# Altium PCB STM32F407VET6mini.PcbDoc
Units mil, origin at the board's own origin, x right, y up, seen from the top; angles counter-clockwise.
Board outline 1950 x 1551 mil, 2 copper layers (Top Layer, Bottom Layer); 5 components, 0 nets, 111 pads, 0 vias.
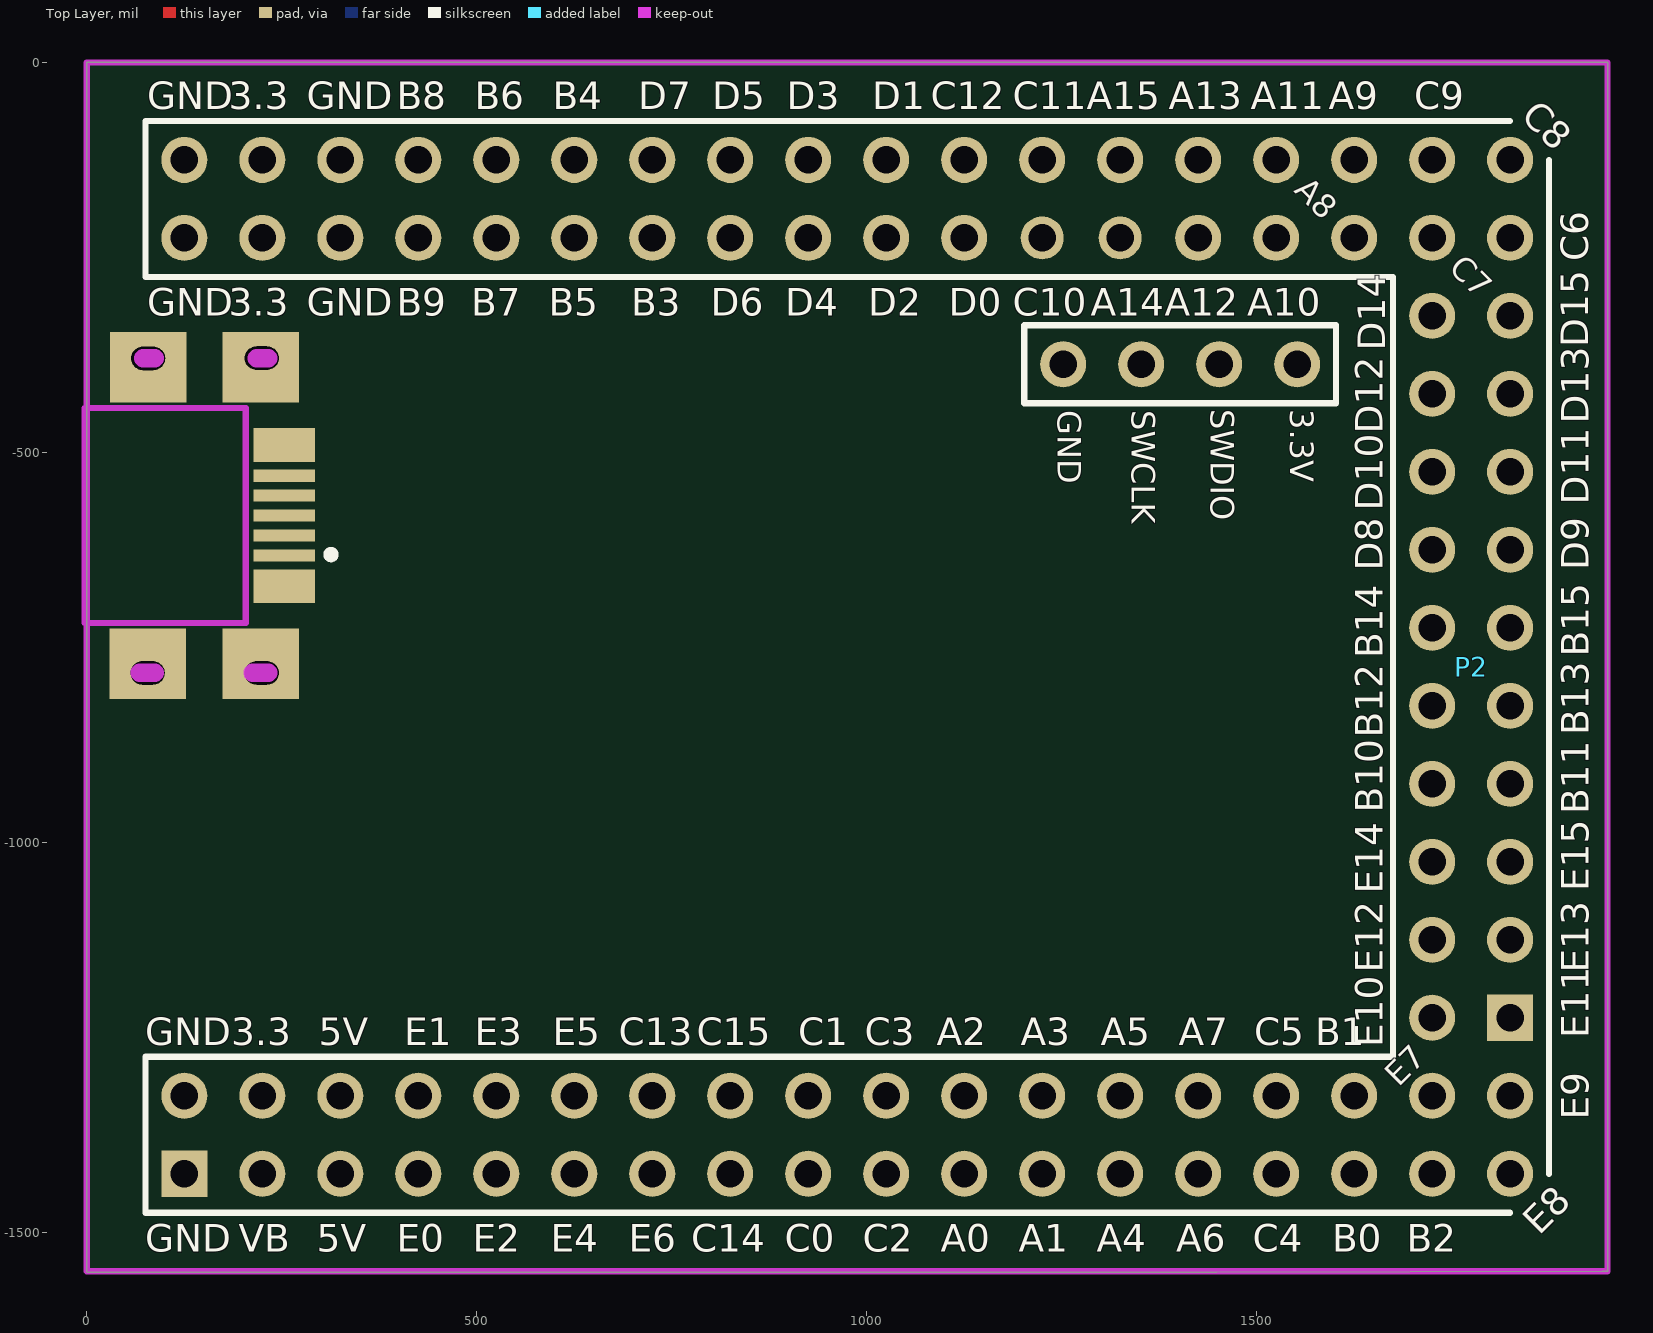
[diagram p0: Top Layer view]
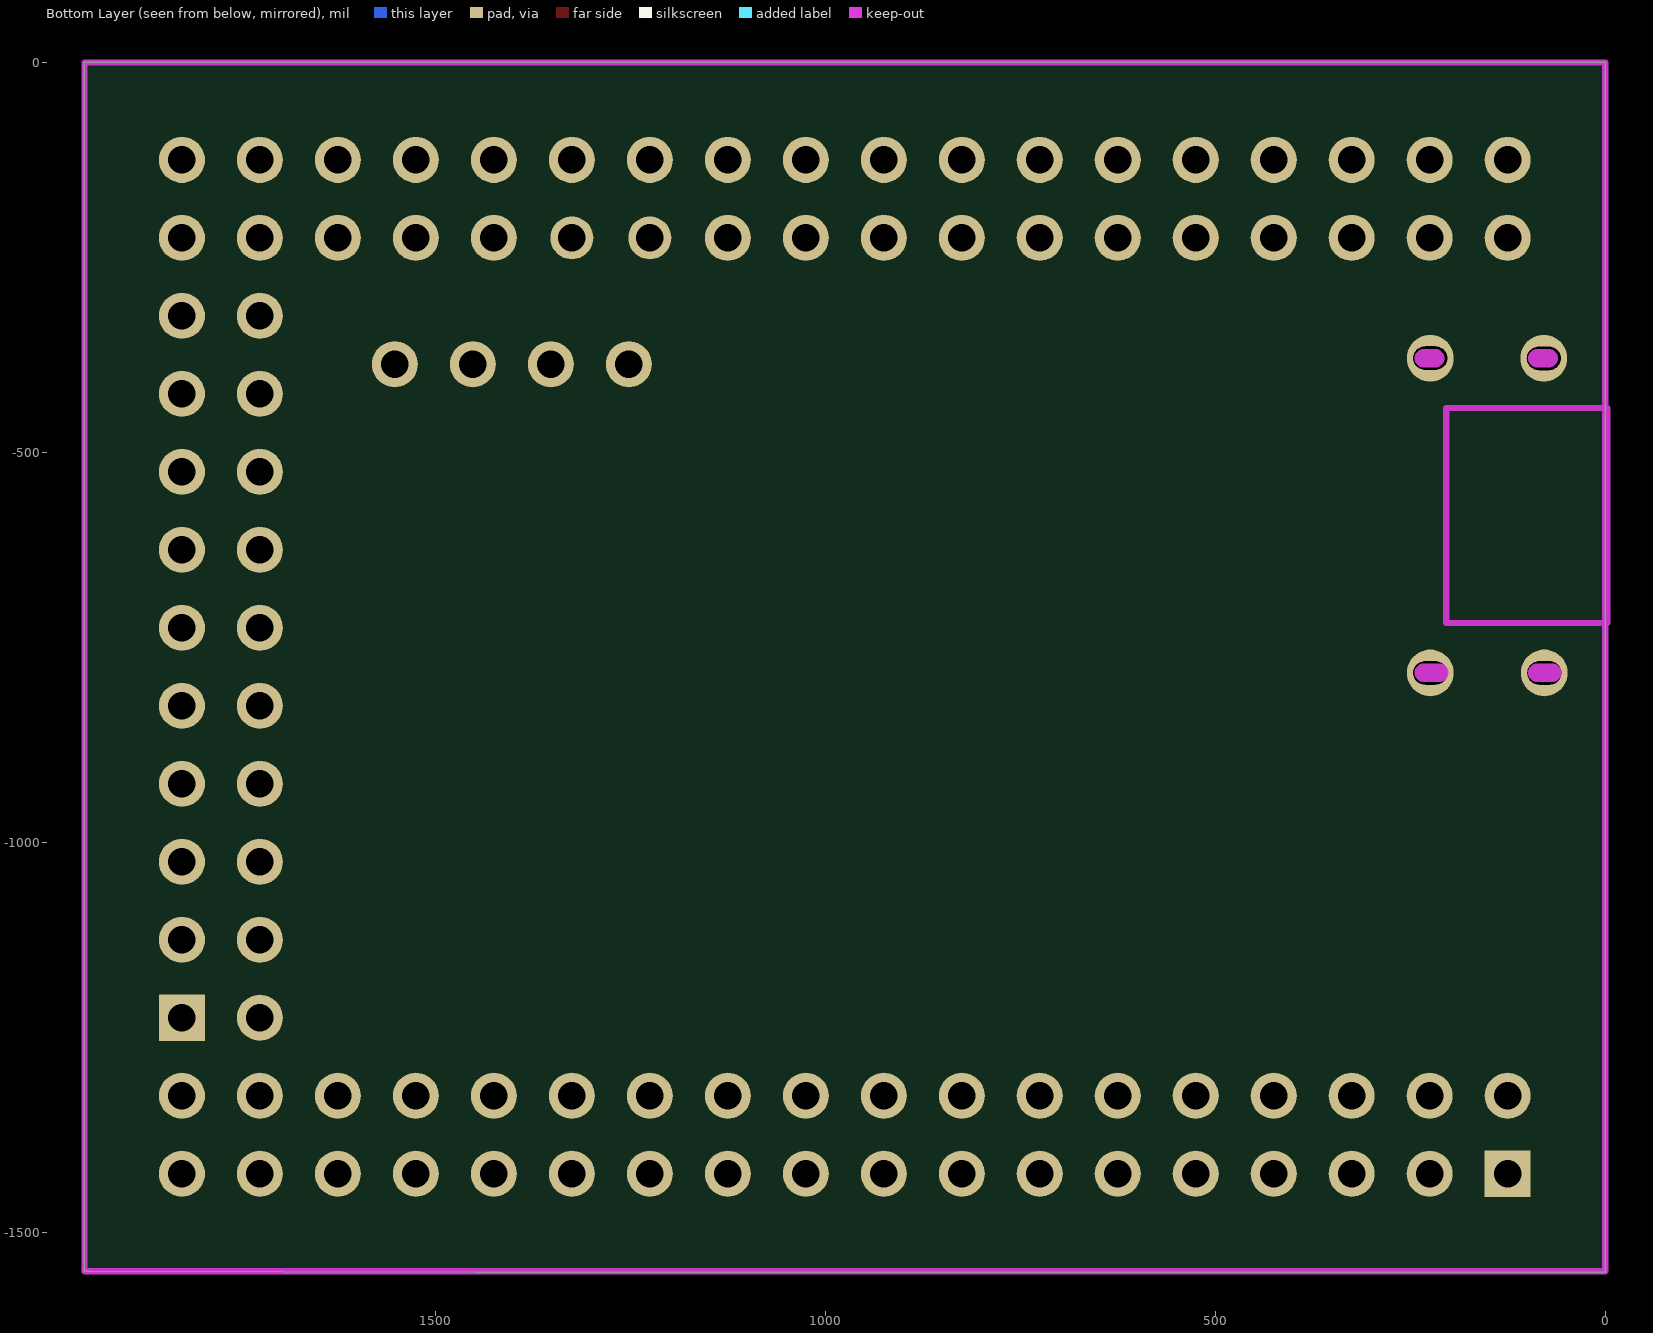
[diagram p1: Bottom Layer view, seen from below]

## Layer stack, top to bottom
Top Solder: solder mask 0.4, Solder Resist, Dk 3.5
Top Layer: signal copper 1.4
Dielectric1: dielectric 12.6, FR-4, Dk 4.8
Bottom Layer: signal copper 1.4
Bottom Solder: solder mask 0.4, Solder Resist, Dk 3.5

## Board outline
1449,-1551 0,-1551 0,-12 0,0 51,0 1950,0 1950,-713 1950,-1550 1943,-1550

## Design rules (kind name [scope] priority, off if disabled: settings)
Clearance [All] p1: gap=6
FabricationTestpoint [(IsPad And (OnTopLayer Or OnBottomLayer))] p1: side=3 testpointundercomponent=TRUE minsize=40 maxsize=100 preferedsize=60 minholesize=0 maxholesize=40 preferedholesize=32 testpointgrid=1 allowsidetop=TRUE allowsidebottom=TRUE usegrid=TRUE gridtolerance=0.01
HoleToHoleClearance [All] p1: gap=0 allowstackedmicrovias=TRUE
MinimumSolderMaskSliver [All] p1: minsoldermaskwidth=0
PolygonConnect PolygonConnect_1 [(InPadClass('All Pads'))] p1: connectstyle=Relief reliefconductorwidth=30 reliefentries=4 polygonreliefangle="90 Angle" airgapwidth=10
PolygonConnect [All] p2: connectstyle=Direct reliefconductorwidth=30 reliefentries=4 polygonreliefangle="90 Angle" airgapwidth=10
RoutingVias [All] p1: holewidth=15 width=30 viastyle="Through Hole" minholewidth=10 minwidth=20 maxholewidth=28 maxwidth=50
SilkToSilkClearance [All] p1: silktosilkclearance=0
SilkToSolderMaskClearance SilkscreenOverComponentPads [IsPad] p1: minsilkscreentomaskgap=0 clearancetoexposedcopper=TRUE
SolderMaskExpansion [All] p1: expansion=4
Width [All] p1: maxlimit=100 minlimit=6 preferedwidth=8 minimp=50.000000 maximp=50.000000 favimp=50.000000
24 further rules are at their usual default settings.

## Components (designator, comment, footprint, x,y, rotation, side; value= is the part's Value field where it differs from the comment)
P1 "Header 18X2" HDR2X18#1 975,-1375 r0 top
P2 "Header 10X2" HDR2X10 1775,-775 r90 top
P3 "Header 18X2" HDR2X18#2 975,-175 r180 top locked
? "Comment" HDR1X4 1552,-387 r180 top
? "Comment" "Micro_USB_v2 - duplicate" 243,-581 r270 top

## Footprints (in the part's own frame and the unit in brackets; to place one, negate y for a bottom-side part, rotate by r counter-clockwise, add the part's x,y. Pads: shape width x height; smd on the part's side, far side on the other; paste and mask are expansions set on the pad)
HDR1X4 [mm] "Connector; Header; 4 Position"
  round 1.5 hole 0.9: 1(0,0) 2(2.54,0) 3(5.08,0) 4(7.62,0)
  silkscreen extent -1.27,-1.27 8.89,1.27
HDR2X10 [mm]
  rect 1.5x1.5 hole 0.9: 1(-11.43,-1.27)
  round 1.5 hole 0.9: 2(-11.43,1.27) 3(-8.89,-1.27) 4(-8.89,1.27) 5(-6.35,-1.27) 6(-6.35,1.27) 7(-3.81,-1.27) 8(-3.81,1.27) 9(-1.27,-1.27) 10(-1.27,1.27) 11(1.27,-1.27) 12(1.27,1.27) 13(3.81,-1.27) 14(3.81,1.27) 15(6.35,-1.27) 16(6.35,1.27) 17(8.89,-1.27) 18(8.89,1.27) 19(11.43,-1.27) 20(11.43,1.27)
  silkscreen extent -12.7,-2.54 12.7,2.54
HDR2X18#1 [mm]
  rect 1.5x1.5 hole 0.9: 1(-21.59,-1.27)
  round 1.5 hole 0.9: 2(-21.59,1.27) 3(-19.05,-1.27) 4(-19.05,1.27) 5(-16.51,-1.27) 6(-16.51,1.27) 7(-13.97,-1.27) 8(-13.97,1.27) 9(-11.43,-1.27) 10(-11.43,1.27) 11(-8.89,-1.27) 12(-8.89,1.27) 13(-6.35,-1.27) 14(-6.35,1.27) 15(-3.81,-1.27) 16(-3.81,1.27) 17(-1.27,-1.27) 18(-1.27,1.27) 19(1.27,-1.27) 20(1.27,1.27) 21(3.81,-1.27) 22(3.81,1.27) 23(6.35,-1.27) 24(6.35,1.27) 25(8.89,-1.27) 26(8.89,1.27) 27(11.43,-1.27) 28(11.43,1.27) 29(13.97,-1.27) 30(13.97,1.27) 31(16.51,-1.27) 32(16.51,1.27) 33(19.05,-1.27) 34(19.05,1.27) 35(21.59,-1.27) 36(21.59,1.27)
  silkscreen extent -22.86,-2.54 22.86,2.54
HDR2X18#2 [mm]
  round 1.5 hole 0.9: 1(-21.59,-1.27) 2(-21.59,1.27) 3(-19.05,-1.27) 4(-19.05,1.27) 5(-16.51,-1.27) 6(-16.51,1.27) 7(-13.97,-1.27) 8(-13.97,1.27) 9(-11.43,-1.27) 10(-11.43,1.27) 11(-8.89,-1.27) 13(-6.35,-1.27) 15(-3.81,-1.27) 16(-3.81,1.27) 17(-1.27,-1.27) 18(-1.27,1.27) 19(1.27,-1.27) 20(1.27,1.27) 21(3.81,-1.27) 22(3.81,1.27) 23(6.35,-1.27) 24(6.35,1.27) 25(8.89,-1.27) 26(8.89,1.27) 27(11.43,-1.27) 28(11.43,1.27) 29(13.97,-1.27) 30(13.97,1.27) 31(16.51,-1.27) 32(16.51,1.27) 33(19.05,-1.27) 34(19.05,1.27) 35(21.59,-1.27) 36(21.59,1.27)
  round 1.4 hole 0.9: 12(-8.89,1.27) 14(-6.35,1.27)
  silkscreen extent -22.86,-2.54 22.86,2.54
"Micro_USB_v2 - duplicate" [mm]
  round 1.524 hole 0.762 slot 1.1 at 90 deg: 0(-5.125,-0.475) 0(-5.12,-4.175) 0(5.125,-0.475) 0(5.125,-4.191)
  rect 0.4x2 smd: 1(1.3,0.254) 2(0.65,0.254) 3(0,0.254) 4(-0.65,0.254) 5(-1.3,0.254)
  rect 2.3x2.5 smd: ""(-4.826,-0.508) ""(-4.826,-4.175) ""(4.826,-0.508) ""(4.826,-4.191)
  rect 1.1x2 smd: ""(-2.3,0.254) ""(2.3,0.254)
  Keep-Out Layer lines w0.203: -3.45,-6.25 3.5,-6.25 3.5,-1 ; -3.5,-6.25 -3.5,-1 ; 3.45,-1 -3.45,-1
  Keep-Out Layer lines w0.6: 5.125,-4.445 5.125,-3.962 ; -5.12,-4.335 -5.12,-3.962 ; 5.125,-0.762 5.125,-0.262 ; -5.125,-0.635 -5.125,-0.262
  silkscreen extent 1.15,1.65 1.4,1.9

## Nets (pads, with @x,y where several pads share a name; then routed paths per layer and width w, separated by ;. In a path a pad name is that pad's centre, name@x,y a point inside that pad or via, vN(x,y) a via of type N, cw(c..) or ccw(c..) an arc to the next point about the centre after c; other vN are vias at no path point)
pads on no net: ?. ?.0 ?.1 ?.2 ?.3 ?.4 ?.5 P1.1 P1.2 P1.3 P1.4 P1.5 P1.6 P1.7 P1.8 P1.9 P1.10 P1.11 P1.12 P1.13 P1.14 P1.15 P1.16 P1.17 P1.18 P1.19 P1.20 P1.21 P1.22 P1.23 P1.24 P1.25 P1.26 P1.27 P1.28 P1.29 P1.30 P1.31 P1.32 P1.33 P1.34 P1.35 P1.36 P2.1 P2.2 P2.3 P2.4 P2.5 P2.6 P2.7 P2.8 P2.9 P2.10 P2.11 P2.12 P2.13 P2.14 P2.15 P2.16 P2.17 P2.18 P2.19 P2.20 P3.1 P3.2 P3.3 P3.4 P3.5 P3.6 P3.7 P3.8 P3.9 P3.10 P3.11 P3.12 P3.13 P3.14 P3.15 P3.16 P3.17 P3.18 P3.19 P3.20 P3.21 P3.22 P3.23 P3.24 P3.25 P3.26 P3.27 P3.28 P3.29 P3.30 P3.31 P3.32 P3.33 P3.34 P3.35 P3.36

## Keep-outs
Keep-Out Layer:
  lines w8: 0,-1550 1950,-1550 1950,0 0,0 0,-1550

## Silkscreen, mask and mechanical layers (free items; w line width, h text height)
Top Overlay:
  text "GND" at 77.26,-60 h35
  text "3.3" at 182.26,-60 h35
  text "GND" at 282.26,-60 h35
  text "B8" at 397.26,-60 h35
  text "B6" at 497.26,-60 h35
  text "B4" at 597.26,-60 h35
  text "D7" at 707.26,-60 h35
  text "D5" at 802.26,-60 h35
  text "D3" at 897.26,-60 h35
  text "D1" at 1007.26,-60 h35
  text "C12" at 1082.26,-60 h35
  text "C11" at 1187.26,-60 h35
  text "A15" at 1282.26,-60 h35
  text "A13" at 1387.26,-60 h35
  text "A11" at 1492.26,-60 h35
  text "A9" at 1592.26,-60 h35
  text "C9" at 1702.26,-60 h35
  text "C8" at 1837.26,-70 h35 r315
  text "A8" at 1547.26,-165 h30 r315
  text "C6" at 1925,-255 h35 r90
  text "C7" at 1745,-265 h30 r315
  text "GND" at 77.26,-325 h35
  text "3.3" at 182.26,-325 h35
  text "GND" at 282.26,-325 h35
  text "B9" at 397.26,-325 h35
  text "B7" at 493.23,-325 h35
  text "B5" at 592.26,-325 h35
  text "B3" at 697.82,-325 h35
  text "D6" at 800,-325 h35
  text "D4" at 895.35,-325 h35
  text "D2" at 1002.26,-325 h35
  text "D0" at 1105,-325 h35
  text "C10" at 1187.26,-325 h35
  text "A14" at 1287.26,-325 h35
  text "A12" at 1382.26,-325 h35
  text "A10" at 1488,-325 h35
  text "D15" at 1925,-365 h35 r90
  text "D14" at 1665,-370 h35 r90
  text "SWDIO" at 1441,-445 h30 r270
  text "3.3V" at 1543,-445 h30 r270
  text "GND" at 1245,-446 h30 r270
  text "SWCLK" at 1340,-446 h30 r270
  text "D13" at 1926,-463 h35 r90
  text "D12" at 1662,-476 h35 r90
  text "D11" at 1926,-567 h35 r90
  text "D10" at 1662,-575 h35 r90
  text "D9" at 1926,-651 h35 r90
  text "D8" at 1662,-652 h35 r90
  text "B15" at 1926,-762 h35 r90
  text "B14" at 1662,-764 h35 r90
  text "B13" at 1926,-863 h35 r90
  text "B12" at 1662,-866 h35 r90
  text "B10" at 1662,-962 h35 r90
  text "B11" at 1926,-964 h35 r90
  text "E15" at 1926,-1063 h35 r90
  text "E14" at 1662,-1066 h35 r90
  text "E12" at 1662,-1167 h35 r90
  text "E13" at 1926,-1167 h35 r90
  text "E11" at 1926,-1251.34 h35 r90
  text "GND" at 75,-1260 h35
  text "3.3" at 185,-1260 h35
  text "5V" at 297.26,-1260 h35
  text "E1" at 407.26,-1260 h35
  text "E3" at 497.26,-1260 h35
  text "E5" at 597.26,-1260 h35
  text "C13" at 682.26,-1260 h35
  text "C15" at 782.26,-1260 h35
  text "C1" at 912.26,-1260 h35
  text "C3" at 997.26,-1260 h35
  text "A2" at 1090.1,-1260 h35
  text "A3" at 1197.26,-1260 h35
  text "A5" at 1299.84,-1260 h35
  text "A7" at 1400.23,-1260 h35
  text "C5" at 1497.26,-1260 h35
  text "B1" at 1575,-1260 h35
  text "E10" at 1662,-1263 h35 r90
  text "E7" at 1682.26,-1315 h30 r45
  text "E9" at 1926,-1356 h35 r90
  text "E8" at 1862.26,-1505 h35 r45
  text "GND" at 75,-1525 h35
  text "VB" at 195,-1525 h35
  text "5V" at 295,-1525 h35
  text "E0" at 397.26,-1525 h35
  text "E2" at 495,-1525 h35
  text "E4" at 595,-1525 h35
  text "E6" at 695,-1525 h35
  text "C14" at 775,-1525 h35
  text "C0" at 895,-1525 h35
  text "C2" at 995,-1525 h35
  text "A0" at 1095,-1525 h35
  text "A1" at 1195,-1525 h35
  text "A4" at 1295,-1525 h35
  text "A6" at 1397.26,-1525 h35
  text "C4" at 1495,-1525 h35
  text "B0" at 1597.26,-1525 h35
  text "B2" at 1692.26,-1525 h35
Bottom Overlay:
  text "http://vcc-gnd.taobao.com/" at 1207.26,1217 h35
  text "http://www.vcc-gnd.com/" at 1194.26,1148 h35

## Dimensions
0,0 to 1950,0 on Top Overlay
0,0 to 0,-1550 on Top Overlay
0,0 to 0,-1550 on Top Overlay
0,0 to 1950,0 on Top Overlay